# Altium PCB AerO2_PCB1.PcbDoc
Units mm, origin at the board's own origin, x right, y up, seen from the top; angles counter-clockwise.
Board outline 60 x 60 mm, 2 copper layers (Top Layer, Bottom Layer); 22 components, 17 nets, 85 pads, 5 vias.
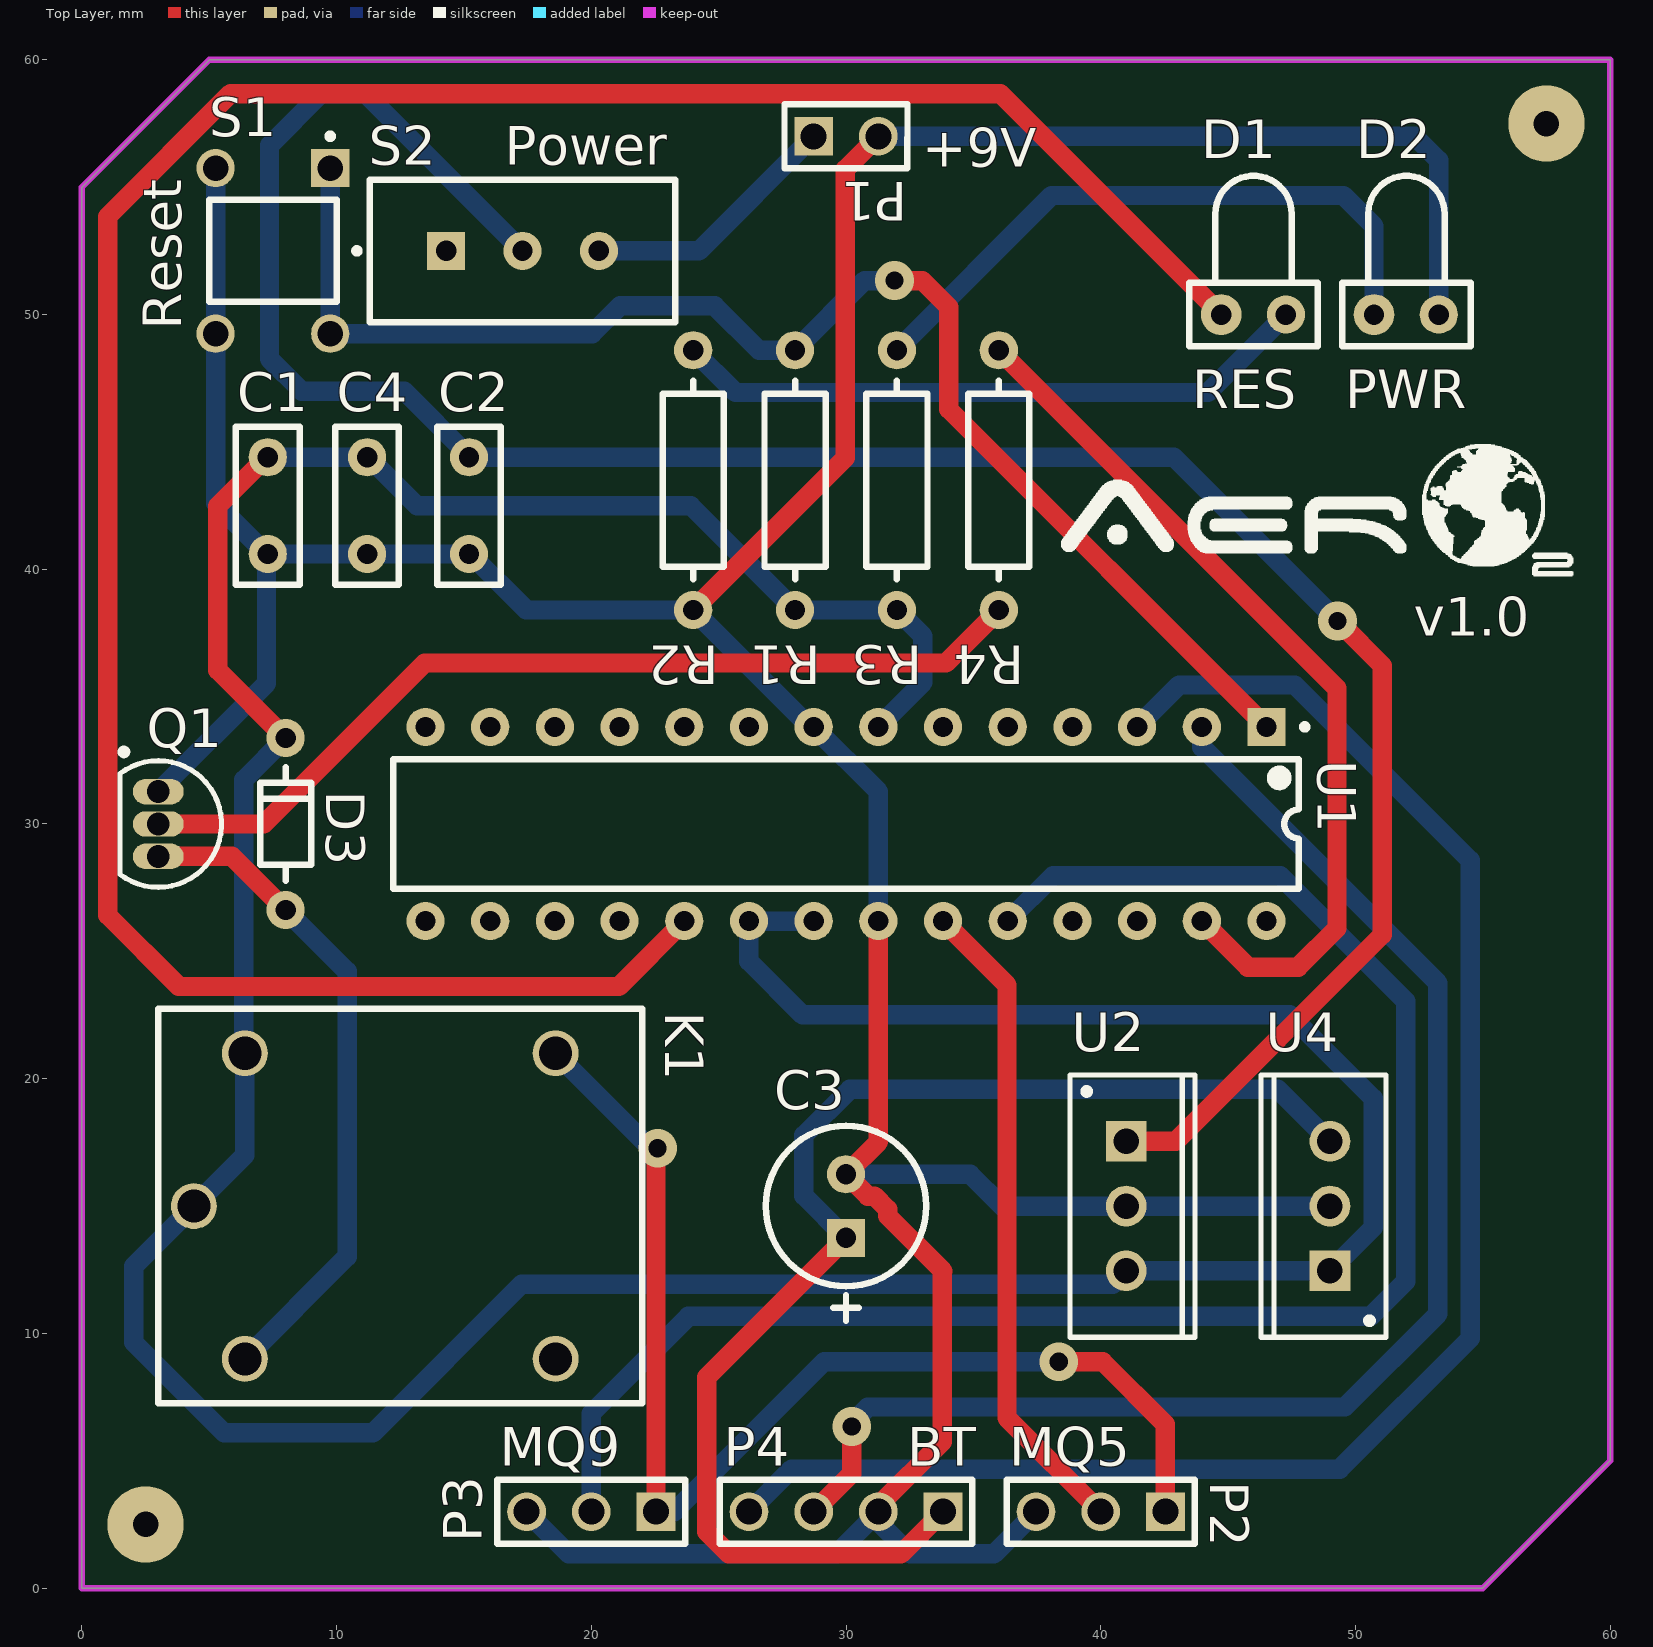
[diagram p0: Top Layer view]
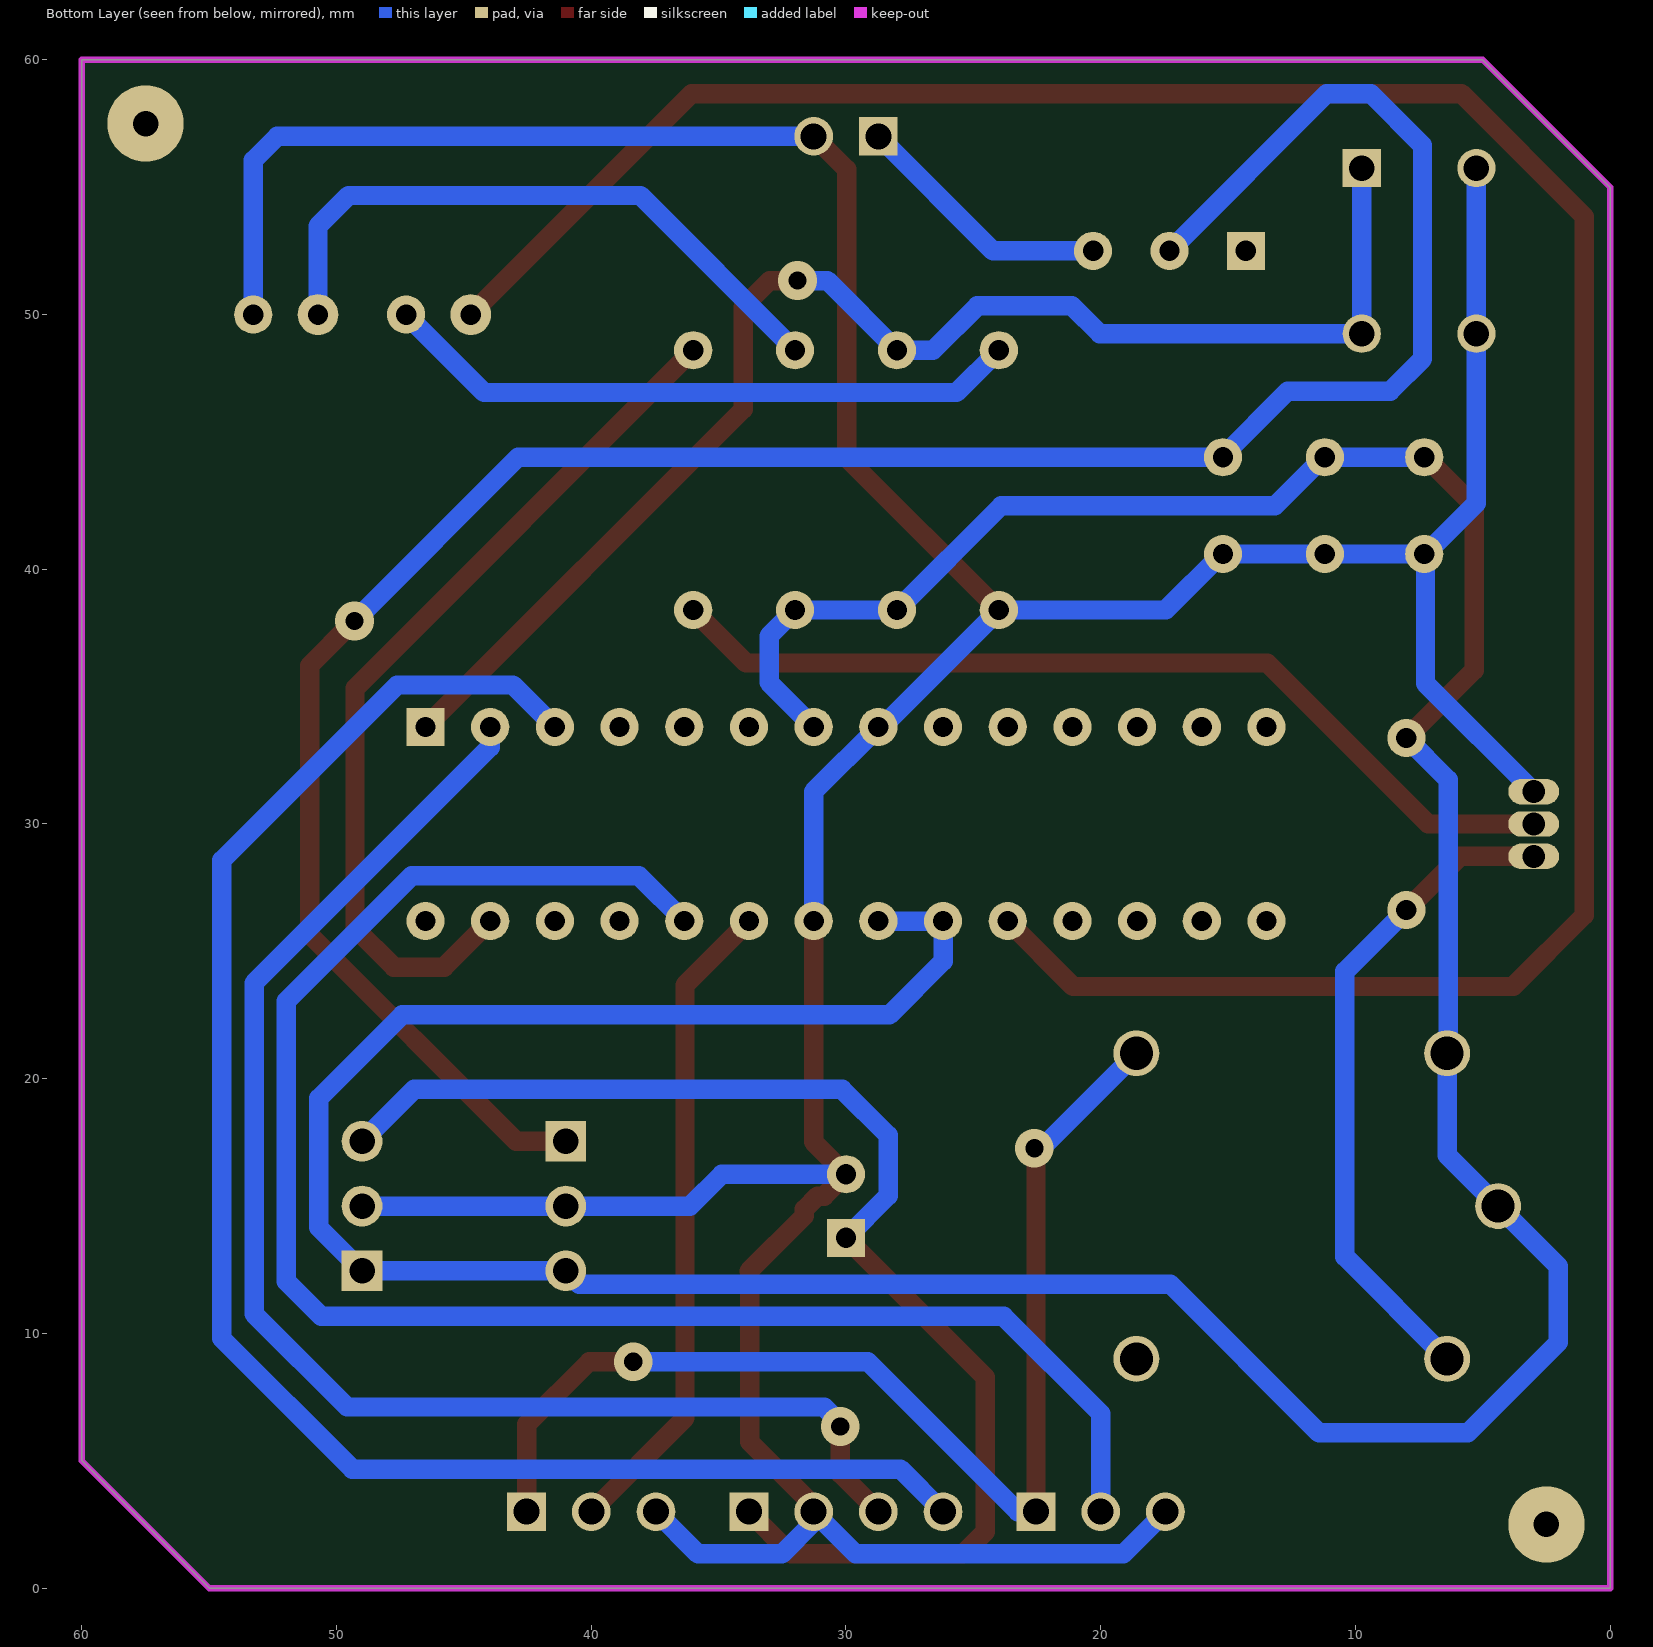
[diagram p1: Bottom Layer view, seen from below]
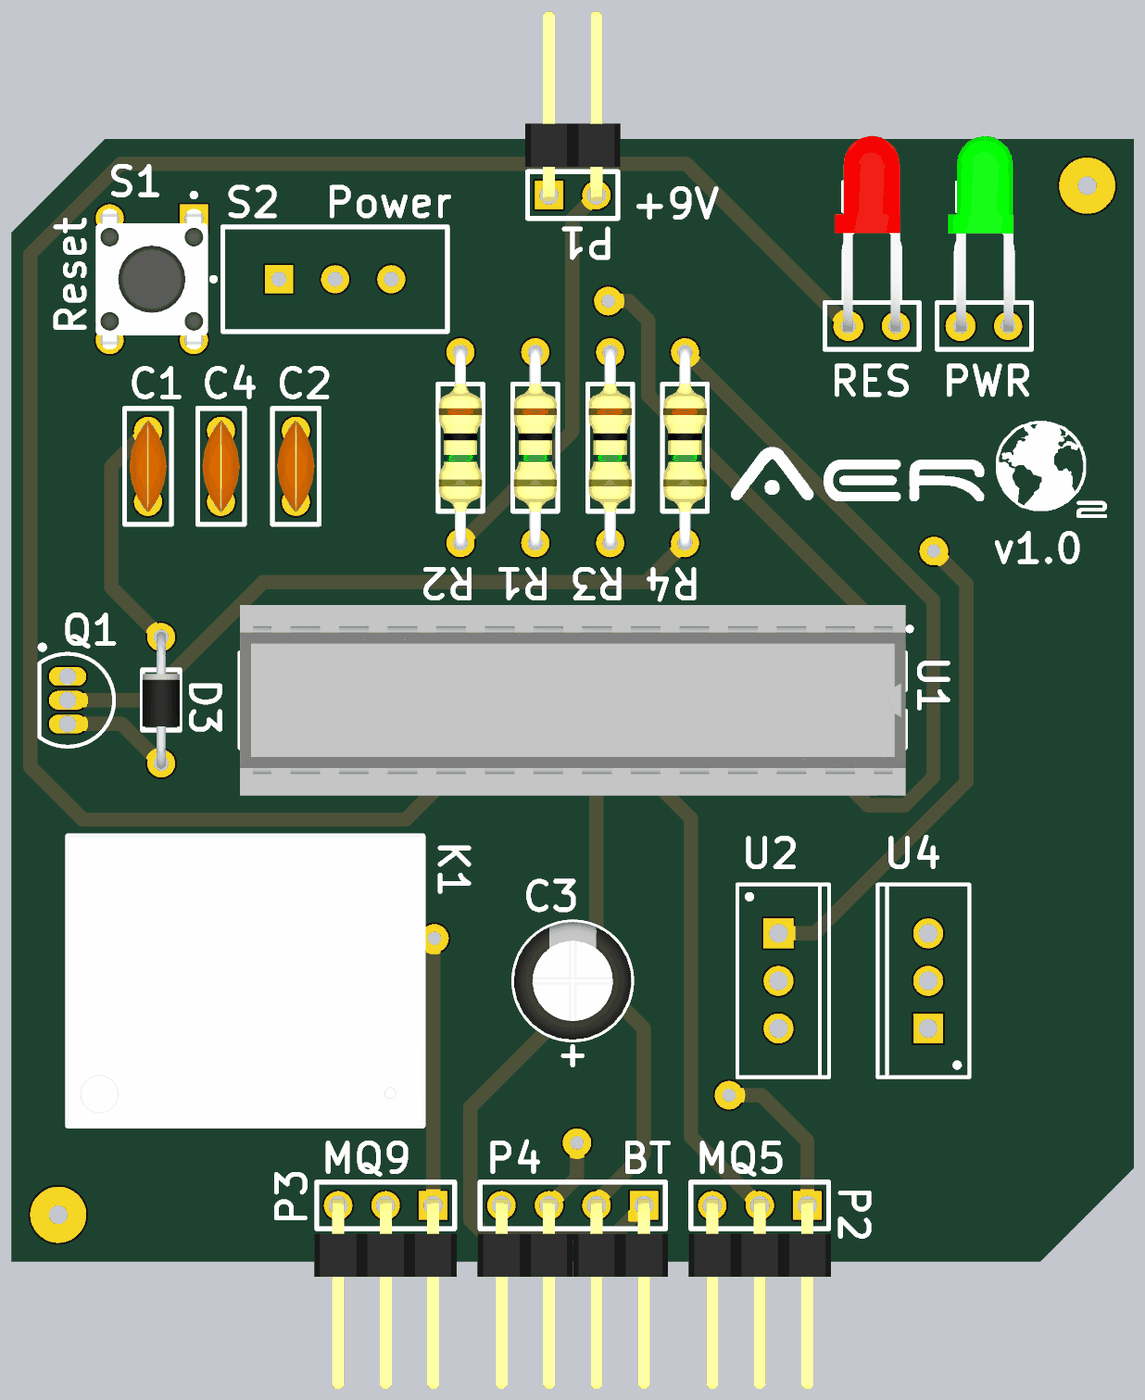
[diagram p2: 3D render of the assembled board from above, using the file's embedded part models]

## Layer stack, top to bottom
Top Solder: solder mask 0.0102, Solder Resist, Dk 3.5
Top Layer: signal copper 0.0356
Dielectric 1: dielectric 0.32, FR-4, Dk 4.8
Bottom Layer: signal copper 0.0356
Bottom Solder: solder mask 0.0102, Solder Resist, Dk 3.5

## Board outline
0,0 0,55 5,60 60,60 60,5 55,0 0,0

## Design rules (kind name [scope] priority, off if disabled: settings)
Clearance "Schematic Clearance Constraint_2" [InNet('NetD3_1')] p1: gap=0.254 except(0.067: THPad-THPad)
Clearance "Schematic Clearance Constraint_1" [InNet('NetQ1_2')] p2: gap=0.254 except(0.067: THPad-THPad)
Clearance "Schematic Clearance Constraint" [InNet('GND')] p3: gap=0.254 except(0.067: THPad-THPad)
Clearance [All] p4: gap=0.254 except(0.508: Track-Track Track-SMDPad Track-THPad Track-Via Track-Fill Track-Poly Track-Region Track-Text)
PolygonConnect [All] p1: connectstyle=Relief reliefconductorwidth=0.254 reliefentries=4 polygonreliefangle="90 Angle" airgapwidth=0.254
RoutingPriority [OnLayer('Bottom Layer')] p1: routingpriority=1
RoutingVias [All] p1: holewidth=0.711 width=1.27 viastyle="Through Hole" minholewidth=0.711 minwidth=1.27 maxholewidth=0.711 maxwidth=1.27
SolderMaskExpansion [All] p1: expansion=0.102
Width [All] p1: maxlimit=0.762 minlimit=0.762 preferedwidth=0.762
29 further rules are at their usual default settings.

## Components (designator, comment, footprint, x,y, rotation, side; value= is the part's Value field where it differs from the comment)
C1 "Cap" "Ceramic Capacitor 5x3_75mm" 7.3,42.5 r270 top
C2 "Cap" "Ceramic Capacitor 5x3_75mm" 15.2,42.5 r270 top
C3 "Cap Pol1" Cap-EL(6_3x12-2_5) 30,15 r90 top
C4 "Cap" "Ceramic Capacitor 5x3_75mm" 11.2,42.5 r90 top
D1 "RES" LED_Red_Right_LG2040 46,50 r0 top
D2 "PWR" "LED_Green_Right_LG2040 - duplicate" 52,50 r0 top
D3 "1N4007" diode_1N4007_6mm 8,30 r90 top
K1 "Relay HRS4(H)" "Relay HRS4(H)" 12.5,15 r0 top
P1 "+9V" Male_Header_Right_Angle_2 30,57 r0 top
P2 "MQ5" Male_Header_Right_Angle_3 40,3 r180 top
P3 "MQ9" Male_Header_Right_Angle_3 20,3 r180 top
P4 "BT" MALE_HEADER_RIGHT_ANGLE_4 30,3 r180 top
Q1 "2N3904" TO-92A 3,30 r180 top
R1 "Res1" custom_resistor 28,43.5 r270 top
R2 "Res1" custom_resistor 24,43.5 r270 top
R3 "Res1" custom_resistor 32,43.5 r270 top
R4 "Res1" custom_resistor 36,43.5 r270 top
S1 "Reset" PB_SPST_Switch 7.5,52.5 r270 top
S2 "Power" SB_SPDT_Switch 17.3,52.5 r0 top
U1 "ATmega328P-PU" ATmega328P-PU 30,30 r180 top
U2 "LM7805" TO-262-AA 41,15 r270 top
U4 "LM3940" TO-262-AA 49,15 r90 top

## Footprints (in the part's own frame and the unit in brackets; to place one, negate y for a bottom-side part, rotate by r counter-clockwise, add the part's x,y. Pads: shape width x height; smd on the part's side, far side on the other; paste and mask are expansions set on the pad)
ATmega328P-PU [mm]
  rect 1.5x1.5 hole 0.8: 1(-16.51,-3.81)
  round 1.5 hole 0.8: 2(-13.97,-3.81) 3(-11.43,-3.81) 4(-8.89,-3.81) 5(-6.35,-3.81) 6(-3.81,-3.81) 7(-1.27,-3.81) 8(1.27,-3.81) 9(3.81,-3.81) 10(6.35,-3.81) 11(8.89,-3.81) 12(11.43,-3.81) 13(13.97,-3.81) 14(16.51,-3.81) 15(16.51,3.81) 16(13.97,3.81) 17(11.43,3.81) 18(8.89,3.81) 19(6.35,3.81) 20(3.81,3.81) 21(1.27,3.81) 22(-1.27,3.81) 23(-3.81,3.81) 24(-6.35,3.81) 25(-8.89,3.81) 26(-11.43,3.81) 27(-13.97,3.81) 28(-16.51,3.81)
  silkscreen extent -18.11,-3.91 17.78,2.54, body extent -17.8,-5.1 17.8,5.1, height 7.98
Cap-EL(6_3x12-2_5) [mm]
  rect 1.5x1.5 hole 0.8: 1(-1.25,0)
  round 1.5 hole 0.8: 2(1.25,0)
  silkscreen extent -4.5,-3.15 3.15,3.15, body extent -3.15,-3.15 3.15,3.15, height 12
"Ceramic Capacitor 5x3_75mm" [mm]
  round 1.5 hole 0.8: 1(-1.9,0) 2(1.9,0)
  silkscreen extent -3.1,-1.25 3.1,1.25, body extent -2.46,-1 2.46,1, height 6.86
custom_resistor [mm]
  round 1.5 hole 0.8: 1(-5.1,0) 2(5.1,0)
  silkscreen extent -3.9,-1.2 3.9,1.2, body extent -5.38,-1.16 5.38,1.16, height 2.92
diode_1N4007_6mm [mm]
  round 1.5 hole 0.8: 1(-3.375,0) 2(3.375,0)
  silkscreen extent -2.23,-1 2.23,1, body extent -3.65,-1 3.65,1.02, height 2
"LED_Green_Right_LG2040 - duplicate" [mm]
  round 1.6 hole 0.8: 1(-1.27,0)
  round 1.5 hole 0.8: 2(1.27,0)
  silkscreen extent -2.52,-1.25 2.52,5.45, body extent -1.97,-0.3 1.55,10.16, height 5
LED_Red_Right_LG2040 [mm]
  round 1.6 hole 0.8: 1(-1.27,0)
  round 1.5 hole 0.8: 2(1.27,0)
  silkscreen extent -2.52,-1.25 2.52,5.45, body extent -2.02,-0.29 1.5,10.16, height 5
Male_Header_Right_Angle_2 [mm]
  rect 1.52x1.52 hole 1.02: 1(-1.27,0)
  round 1.52 hole 1.02: 2(1.27,0)
  silkscreen extent -2.41,-1.25 2.41,1.25, body extent -2.54,-0.32 2.54,9.81, height 2.51
Male_Header_Right_Angle_3 [mm]
  rect 1.52x1.52 hole 1.02: 1(-2.54,0)
  round 1.52 hole 1.02: 2(0,0) 3(2.54,0)
  silkscreen extent -3.68,-1.25 3.68,1.25, body extent -3.81,-0.32 3.81,9.81, height 2.51
MALE_HEADER_RIGHT_ANGLE_4 [mm]
  rect 1.52x1.52 hole 1.02: 1(-3.81,0)
  round 1.52 hole 1.02: 2(-1.27,0) 3(1.27,0) 4(3.81,0)
  silkscreen extent -4.95,-1.25 4.95,1.25, body extent -5.08,-0.32 5.08,9.81, height 2.51
PB_SPST_Switch [mm]
  rect 1.5x1.5 hole 1: 1(-3.25,2.25)
  round 1.5 hole 1: 1(3.25,2.25) 2(-3.25,-2.25) 2(3.25,-2.25)
  silkscreen extent -4.6,-2.5 2,2.5, body extent -4.11,-3 4.11,3, height 7.41
"Relay HRS4(H)" [mm]
  round 1.8 hole 1.3: 1(-8.1,0) 2(-6.1,-6) 3(6.1,-6) 4(6.1,6) 5(-6.1,6)
  silkscreen extent -9.5,-7.75 9.5,7.75, body extent -9.5,-7.75 9.5,7.75, height 15.3
SB_SPDT_Switch [mm]
  rect 1.5x1.5 hole 0.8: 1(-3,0)
  round 1.5 hole 0.8: 2(0,0) 3(3,0)
  silkscreen extent -6.6,-2.8 6,2.8, body extent -6.02,-2.8 6.03,2.8, height 7
TO-92A [mm] "TO, Flat Index; 3 In-Line, Axial Leads; Body Dia. 4.5mm; Leads 0.51 x 0.48 mm (max)"
  oval 2x1 hole 0.9: 1(0,-1.27) 2(0,0) 3(0,1.27)
  silkscreen extent -2.48,-2.95 1.5,2.48, body extent -2.48,-2.5 1.5,2.5, height 6.86
TO-262-AA [mm] "TO, Thru-Hole, Vertical, Heatsink Mounted; 3 In-Line Leads; Pitch 2.54 mm"
  rect 1.6x1.6 hole 1: 1(-2.54,0)
  round 1.6 hole 1: 2(0,0) 3(2.54,0)
  silkscreen extent -5.15,-2.2 5.15,2.7, body extent -5.2,-2.25 5.2,2.75, height 19.7

## Part data
C1 C2 C4: "Capacitor"
C3: "Polarized Capacitor (Radial)"
D1 D2: library part LED0, "Typical INFRARED GaAs LED"
D3: library part Diode, "Default Diode"
P1: library part "Header 2", "Header, 2-Pin"
P2 P3: library part "Header 3", "Header, 3-Pin"
P4: library part "Header 4", "Header, 4-Pin"
Q1: "NPN General Purpose Amplifier"
R1 R2 R3 R4: "Resistor"
S1: library part SW-PB, "Switch"
S2: library part SW-SPDT, "SPDT Subminiature Toggle Switch, Right Angle Mounting, Vertical Actuation"
U1: "8-bit AVR Microcontroller, 32KB Flash, 1KB EEPROM, 2KB SRAM, 28-pin PDIP, Industrial Grade (-40°C to 85°C)"
U2 U4: library part µA78M05CKC, "Positive-Voltage Regulator"

## Free pads (board coordinates)
  round 3 hole 1: ""(2.5,2.5) ""(57.5,57.5)

## Via types
v1: diameter 1.524, hole 0.711, Top Layer to Bottom Layer, 5 vias

## Nets (pads, with @x,y where several pads share a name; then routed paths per layer and width w, separated by ;. In a path a pad name is that pad's centre, name@x,y a point inside that pad or via, vN(x,y) a via of type N, cw(c..) or ccw(c..) an arc to the next point about the centre after c; other vN are vias at no path point)
+9VDC: C2.1 S2.2 U2.1 | length 94.2
  Top Layer w0.762: U2.1 42.94,17.54 51.054,25.654 51.054,36.22 v1@49.428,37.846
  Bottom Layer w0.762: S2.2 11.126,58.674 9.398,58.674 7.366,56.642 7.366,48.26 8.636,46.99 12.66,46.99 15.25,44.4 42.874,44.4 v1(49.301,37.973)
GND: C1.2 C2.2 C3.2 C4.1 D2.2 P1.2 P2.3 P3.3 P4.2 Q1.1 R2.2 S1.2 U1.8 U1.22 U2.2 U4.2 | length 179.1
  Top Layer w0.762: R2.2 29.972,44.372 29.972,55.702 P1.2 ; P4.2 31.27,3.237 33.782,5.749 33.782,12.446 33.804,12.446 31.639,14.611 31.639,14.868 31.118,15.389 30.861,15.389 C3.2 31.27,17.52 U1.22
  Bottom Layer w0.762: Q1.1 7.25,35.52 C1.2@7.25,40.6 ; S1.2@5.25,55.75 5.25,49.25 5.25,42.6 C1.2@7.25,40.6 ; P3.3 19.114,1.346 29.616,1.346 P4.2 31.27,2.588 32.512,1.346 35.806,1.346 P2.3 ; C3.2 34.874,16.25 36.124,15 U2.2 U4.2 ; U1.22 31.27,31.27 U1.8 28.59,33.81 R2.2 17.45,38.4 15.25,40.6 11.25,40.6 C1.2@7.25,40.6 ; P1.2 52.324,57 53.27,56.054 D2.2
NetC3_1: C3.1 P4.1 U4.3 | length 51.1
  Top Layer w0.762: C3.1 24.536,8.286 24.536,2.21 25.4,1.346 32.156,1.346 P4.1
  Bottom Layer w0.762: C3.1 28.346,15.404 28.346,17.78 30.15,19.583 46.957,19.583 U4.3
NetD1_1: D1.1 U1.19 | length 101.6
  Top Layer w0.762: U1.19 21.082,23.622 3.81,23.622 1.016,26.416 1.016,53.848 5.842,58.674 36.056,58.674 D1.1
NetD1_2: D1.2 R2.1 | length 25.2
  Bottom Layer w0.762: R2.1 25.66,46.94 44.21,46.94 D1.2
NetD2_1: D2.1 R3.1 | length 25.2
  Bottom Layer w0.762: R3.1 38.074,54.674 49.529,54.674 50.73,53.473 D2.1
NetD3_1: D3.1 K1.2 Q1.3 | length 26.2
  Top Layer w0.762: Q1.3 5.895,28.73 D3.1
  Bottom Layer w0.762: K1.2 10.414,13.014 10.414,24.211 D3.1
NetP1_1: P1.1 S2.3 | length 10.3
  Bottom Layer w0.762: S2.3 24.23,52.5 P1.1
NetQ1_2: Q1.2 R4.2 | length 36.5
  Top Layer w0.762: Q1.2 7.14,30 13.462,36.322 33.922,36.322 R4.2
NetR1_1: R1.1 S1.1 U1.1 | length 55.2
  Top Layer w0.762: v1(31.902,51.333) 32.995,51.333 34.036,50.292 34.036,46.284 U1.1
  Bottom Layer w0.762: S1.1@9.75,55.75 9.75,49.25 20.04,49.25 21.133,50.343 24.841,50.343 26.584,48.6 R1.1 30.733,51.333 v1(31.902,51.333)
"PC0 (ADC0 / PCINT8)": P2.2 U1.23 | length 25.8
  Top Layer w0.762: U1.23 36.322,23.678 36.322,6.678 P2.2
"PC1 (ADC1 / PCINT9)": P3.2 U1.24 | length 67.4
  Bottom Layer w0.762: P3.2 20,6.858 23.81,10.668 50.597,10.668 51.968,12.04 51.968,23.049 47.052,27.965 38.125,27.965 U1.24
"PC4 (ADC4/ SDA/ PCINT12)": R4.1 U1.27 | length 34.9
  Top Layer w0.762: R4.1 49.276,35.324 49.276,25.908 47.752,24.384 45.776,24.384 U1.27
"PD0 (PCINT16 / RXD)": P4.3 U1.2 | length 55.8
  Top Layer w0.762: P4.3 30.226,4.496 v1(30.226,6.35)
  Bottom Layer w0.762: v1(30.226,6.35) 30.226,6.477 30.861,7.112 49.581,7.112 53.238,10.77 53.238,23.752 43.97,33.02 U1.2
"PD1 (PCINTI7 / TXD)": P4.4 U1.3 | length 66.5
  Bottom Layer w0.762: P4.4 27.864,4.674 49.378,4.674 54.508,9.804 54.508,28.569 47.619,35.458 43.078,35.458 U1.3
POWER_MQ: K1.4 P2.1 P3.1 | length 46.7
  Top Layer w0.762: P3.1 22.54,17.206 v1(22.606,17.272) ; v1(38.354,8.89) 40.081,8.89 42.54,6.431 P2.1
  Bottom Layer w0.762: K1.4 22.328,17.272 v1(22.606,17.272) ; P3.1 23.251,3 29.141,8.89 v1(38.354,8.89)
VCC5V: C1.1 C4.2 D3.2 K1.1 K1.5 R1.2 R3.2 U1.7 U1.20 U1.21 U2.3 U4.1 | length 161.5
  Top Layer w0.762: C1.1@7.25,44.4 5.334,42.484 5.334,36.041 D3.2
  Bottom Layer w0.762: K1.5@6.361,21 6.361,31.736 D3.2 ; K1.5 6.4,17 K1.1 2.032,12.632 2.032,9.652 5.588,6.096 11.43,6.096 17.272,11.938 40.478,11.938 U2.3 U4.1 50.698,14.158 50.698,19.228 47.422,22.504 28.296,22.504 26.19,24.61 U1.20 U1.21 ; C1.1@7.25,44.4 11.25,44.4 13.156,42.494 23.906,42.494 R1.2 R3.2 33.02,37.38 33.02,35.56 U1.7
pads on no net: K1.3 S2.1 U1.4 U1.5 U1.6 U1.9 U1.10 U1.11 U1.12 U1.13 U1.14 U1.15 U1.16 U1.17 U1.18 U1.25 U1.26 U1.28

## Keep-outs
Keep-Out Layer:
  the board outline again, w0.254

## Silkscreen, mask and mechanical layers (free items; w line width, h text height)
Top Overlay:
  drawing of 1050 lines, arcs and shapes, not listed
  text "v1.0" at 52.299,37.389 h1.52